# Altium PCB PCB1.PcbDoc
Units mm, origin at the board's own origin, x right, y up, seen from the top; angles counter-clockwise.
Board outline 51.69 x 44.07 mm, 2 copper layers (Top Layer, Bottom Layer); 36 components, 30 nets, 140 pads, 19 vias.
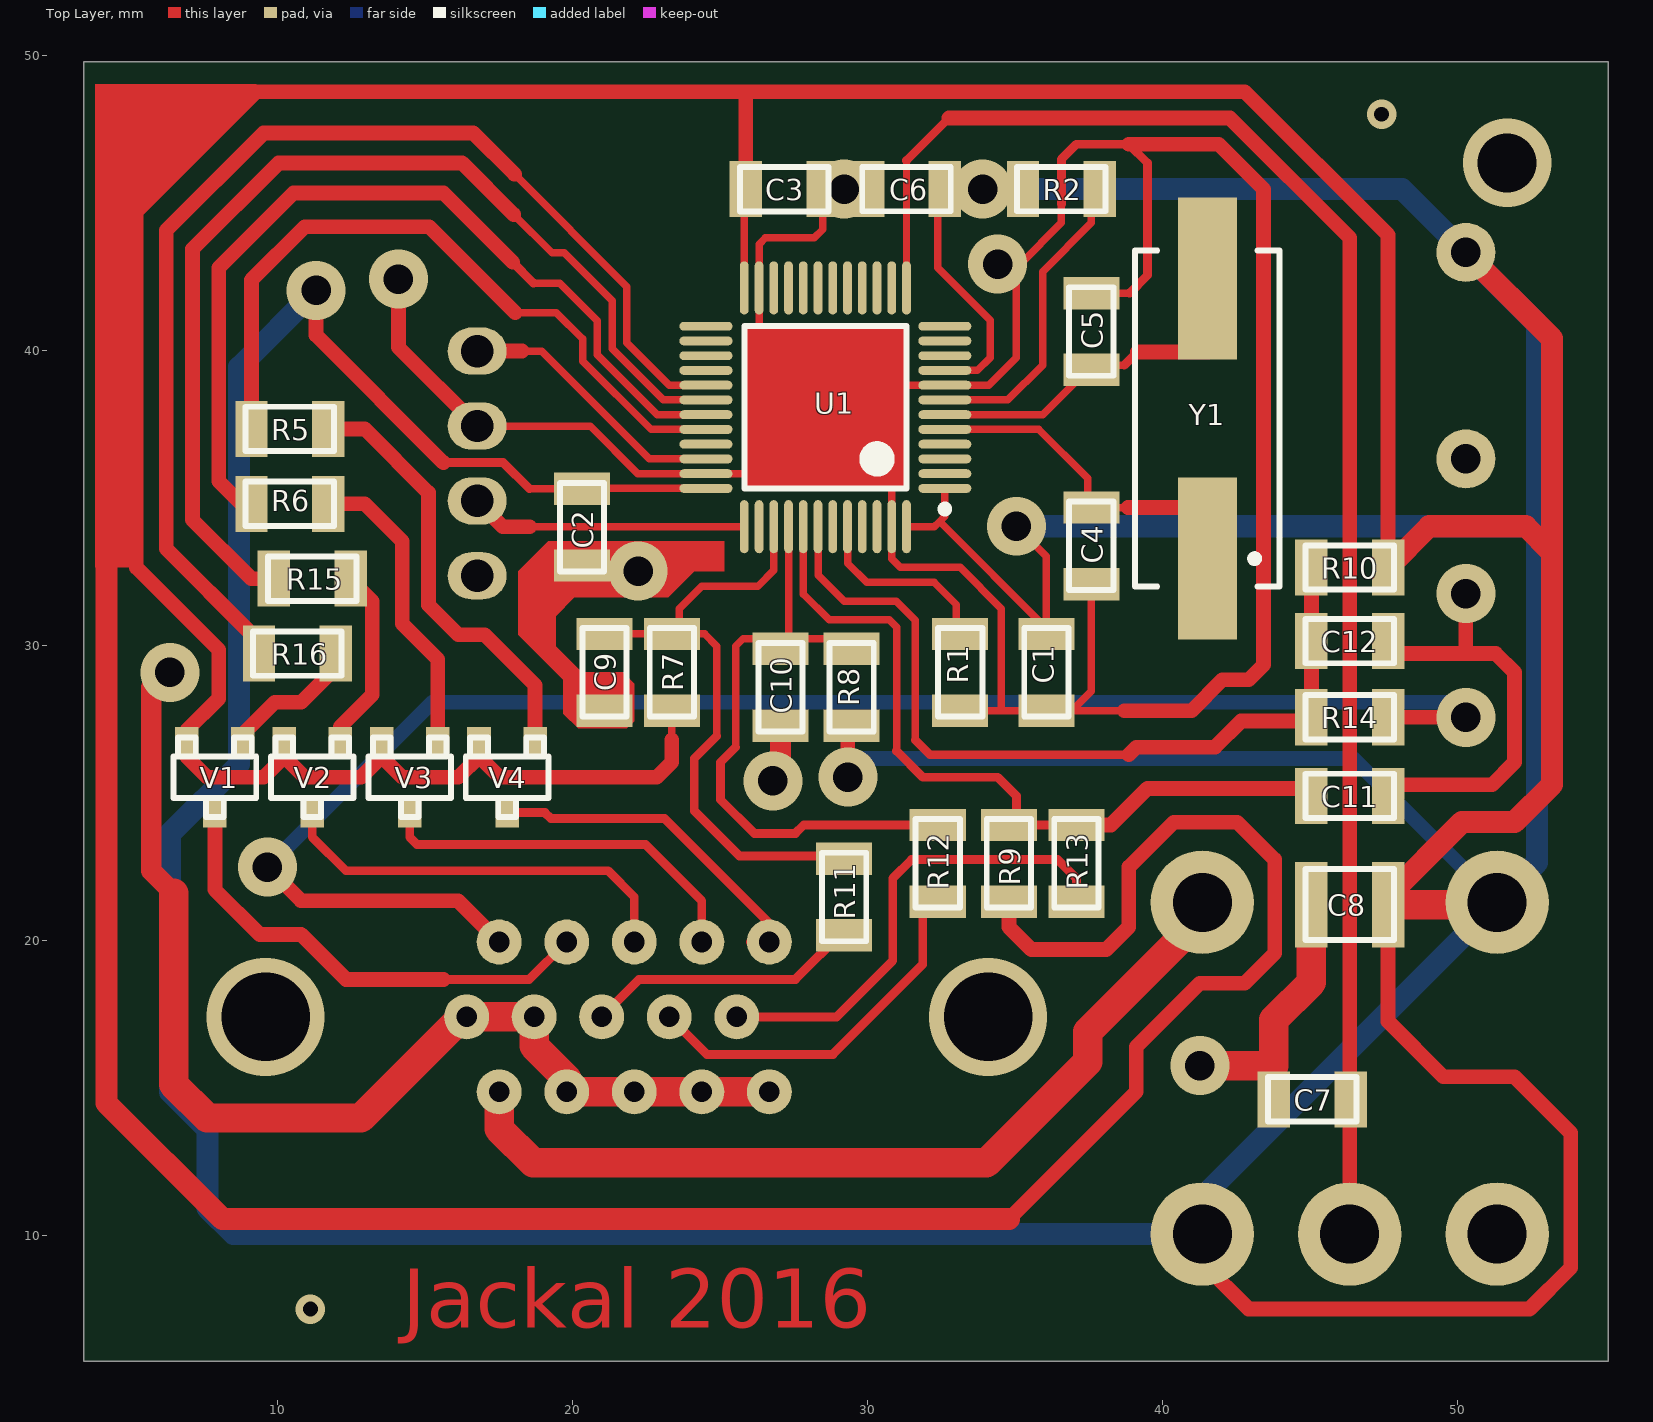
[diagram p0: Top Layer view]
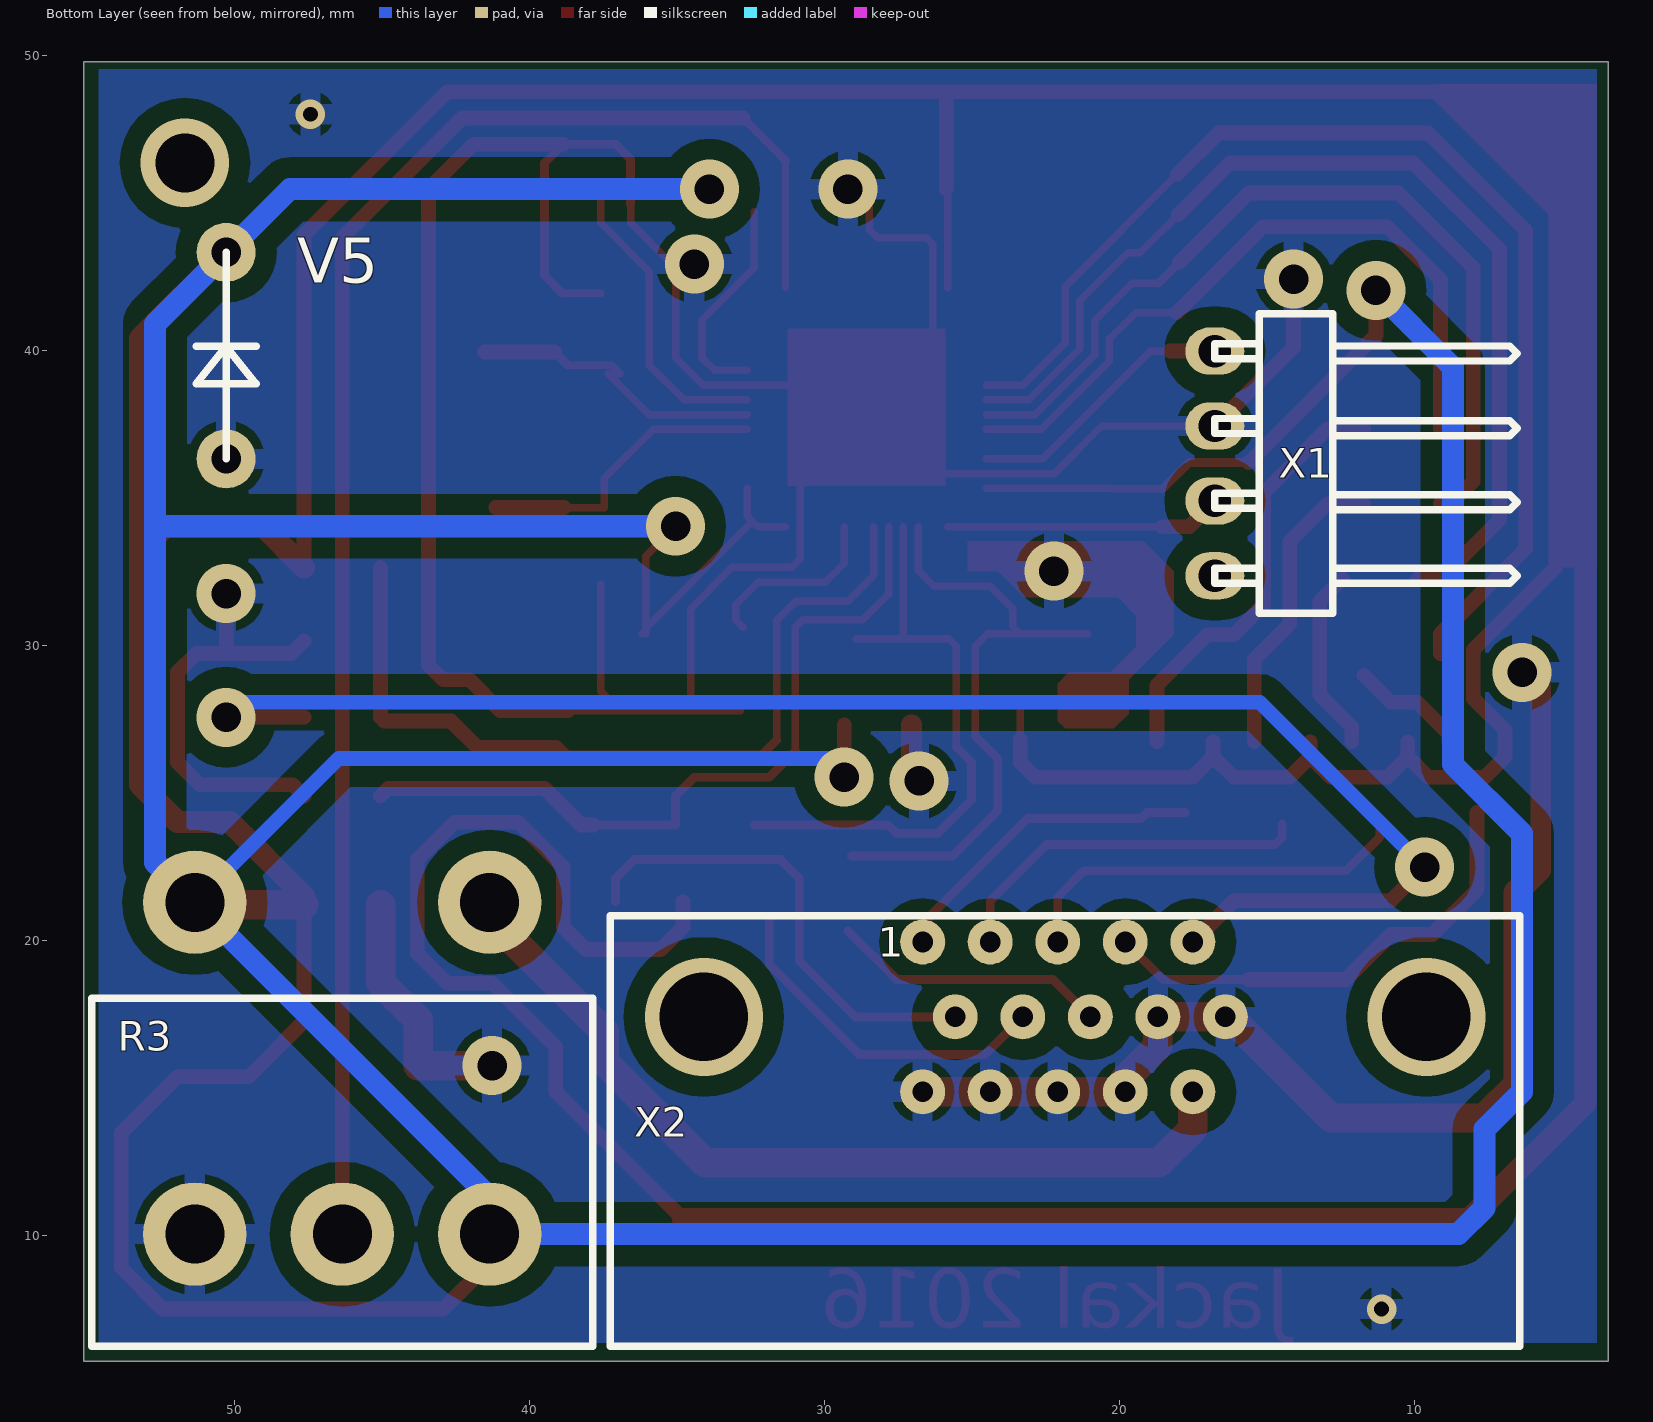
[diagram p1: Bottom Layer view, seen from below]

## Layer stack, top to bottom
Top Solder: solder mask 0.0102, Solder Resist, Dk 3.5
Top Layer: signal copper 0.0356
Dielectric 1: dielectric 0.32, FR-4, Dk 4.8
Bottom Layer: signal copper 0.0356
Bottom Solder: solder mask 0.0102, Solder Resist, Dk 3.5

## Board outline
3.429,5.715 55.118,5.715 55.118,49.784 3.429,49.784

## Design rules (kind name [scope] priority, off if disabled: settings)
Clearance Clearance_for_poly [All vs InPolygon] p1: gap=0.7
Clearance [All] p2: gap=0.2
PlaneClearance [All] p1: clearance=0.7
PolygonConnect [All] p1: connectstyle=Relief reliefconductorwidth=0.7 reliefentries=4 polygonreliefangle="90 Angle" airgapwidth=0.3
RoomDefinition RoomLQFP [InComponentClass('Sheet')] p1: confinementstyle=ConfineIn formatcopy=TRUE lockcomponents=FALSE outline 18.796,44.958 38.608,44.958 38.608,27.559 18.796,27.559
RoutingVias [All] p1: holewidth=0.711 width=1.27 viastyle="Through Hole" minholewidth=0.711 minwidth=1.27 maxholewidth=0.711 maxwidth=1.27
SolderMaskExpansion [All] p1: expansion=0.102
Width Width_for_LQFP_room [TouchesRoom('RoomLQFP') AND (NOT OnLayer('Bottom Layer'))] p1: maxlimit=0.254 minlimit=0.254 preferedwidth=0.254
Width [All] p2: maxlimit=1 minlimit=0.3 preferedwidth=1
28 further rules are at their usual default settings.

## Components (designator, comment, footprint, x,y, rotation, side; value= is the part's Value field where it differs from the comment)
C1 "C1206" C1206 36.068,29.083 r90 top
C2 "C1206" C1206 20.32,34.006 r90 top
C3 "C1206" C1206 27.178,45.466 r180 top
C4 "C1206" C1206 37.592,33.371 r90 top
C5 "C1206" C1206 37.592,40.64 r270 top
C6 "C1206" C1206 31.325,45.466 r0 top
C7 "C1206" C1206 45.085,14.605 r0 top
C8 "33mk" C1210 46.355,21.209 r0 top
C9 "C1206" C1206 21.082,29.083 r90 top
C10 "C1206" C1206 27.051,28.575 r90 top
C11 "C1206" C1206 46.355,24.892 r180 top
C12 "C1206" C1206 46.355,30.141 r180 top
R1 "R1206-0,25 W" R1206 33.147,29.083 r90 top
R2 "R1206-0,25 W" R1206 36.576,45.466 r0 top
R3 "10k" S16KN1 46.355,10.033 r180 bottom
R5 "R1206-0,25 W" R1206 10.414,37.338 r0 top
R6 "R1206-0,25 W" R1206 10.414,34.798 r0 top
R7 "R1206-0,25 W" R1206 23.368,29.083 r270 top
R8 "R1206-0,25 W" R1206 29.464,28.575 r270 top
R9 "R1206-0,25 W" R1206 34.798,22.606 r270 top
R10 "R1206-0,25 W" R1206 46.355,32.639 r0 top
R11 "R1206-0,25 W" R1206 29.21,21.463 r90 top
R12 "R1206-0,25 W" R1206 32.385,22.606 r90 top
R13 "R1206-0,25 W" R1206 37.084,22.606 r90 top
R14 "R1206-0,25 W" R1206 46.355,27.559 r180 top
R15 "R1206-0,25 W" R1206 11.176,32.258 r0 top
R16 "R1206-0,25 W" R1206 10.668,29.718 r0 top
U1 "STM32F103C8T6" LQFP48_N 28.575,38.07 r180 top
V1 "BSS84" SOT-23 7.874,25.527 r180 top
V2 "BSS84" SOT-23 11.176,25.527 r180 top
V3 "BSS84" SOT-23 14.478,25.527 r180 top
V4 "BSS84" SOT-23 17.78,25.527 r180 top
V5 "1N4001" doid 50.292,36.322 r90 bottom
X1 "PLS-4R" PLS-4R 16.764,32.355 r90 bottom
X2 "sourse" DHR15-FB 21.844,17.399 r180 bottom
Y1 "XTAL" HC49/4H_SMX 41.529,37.689 r90 top

## Footprints (in the part's own frame and the unit in brackets; to place one, negate y for a bottom-side part, rotate by r counter-clockwise, add the part's x,y. Pads: shape width x height; smd on the part's side, far side on the other; paste and mask are expansions set on the pad)
C1206 [mm]
  rect 1.1x1.9 smd: 1(-1.3,0) 2(1.3,0)
  silkscreen extent -1.5,-0.75 1.5,0.75, body extent -1.61,-0.86 1.61,0.86, height 1.5
C1210 [mm]
  rect 1.1x2.9 smd: 1(-1.3,0) 2(1.3,0)
  silkscreen extent -1.5,-1.2 1.5,1.2, body extent -1.61,-1.31 1.61,1.31, height 1.7
DHR15-FB [mil]
  round 60 hole 27.56: 1(-190.16,100) 2(-100,100) 3(-9.84,100) 4(80.32,100) 5(170.47,100) 6(-146.65,0) 7(-56.5,0) 8(33.66,0) 9(123.82,0) 10(213.98,0) 11(-190.16,-100) 12(-100,-100) 13(-9.84,-100) 14(80.32,-100) 15(170.47,-100)
  silkscreen extent -607,-440 607,135, body extent -607,-696 606,135, height 495
doid [mm]
  round 2 hole 1: 1(7,0) 2(0,0)
  silkscreen extent 0,-1.02 7,1.02
HC49/4H_SMX [mm] "Quartz Crystal, SM; Body 13.4 (inc. leads) x 4.9 mm (LxW max)"
  rect 5.5x2 smd: 1(-4.75,0) 2(4.75,0)
  silkscreen extent -5.7,-2.45 5.7,2.45
LQFP48_N [mm] "Thin QFP, 48-Leads, Body 7x7mm, Pitch 0.5mm, IPC Medium Density"
  oval 1.8x0.3 smd: 1(-4.05,2.75) 2(-4.05,2.25) 3(-4.05,1.75) 4(-4.05,1.25) 5(-4.05,0.75) 6(-4.05,0.25) 7(-4.05,-0.25) 8(-4.05,-0.75) 9(-4.05,-1.25) 10(-4.05,-1.75) 11(-4.05,-2.25) 12(-4.05,-2.75) 25(4.05,-2.75) 26(4.05,-2.25) 27(4.05,-1.75) 28(4.05,-1.25) 29(4.05,-0.75) 30(4.05,-0.25) 31(4.05,0.25) 32(4.05,0.75) 33(4.05,1.25) 34(4.05,1.75) 35(4.05,2.25) 36(4.05,2.75)
  oval 0.3x1.8 smd: 13(-2.75,-4.05) 14(-2.25,-4.05) 15(-1.75,-4.05) 16(-1.25,-4.05) 17(-0.75,-4.05) 18(-0.25,-4.05) 19(0.25,-4.05) 20(0.75,-4.05) 21(1.25,-4.05) 22(1.75,-4.05) 23(2.25,-4.05) 24(2.75,-4.05) 37(2.75,4.05) 38(2.25,4.05) 39(1.75,4.05) 40(1.25,4.05) 41(0.75,4.05) 42(0.25,4.05) 43(-0.25,4.05) 44(-0.75,4.05) 45(-1.25,4.05) 46(-1.75,4.05) 47(-2.25,4.05) 48(-2.75,4.05)
  silkscreen extent -4.18,-2.75 2.75,3.57, body extent -3.5,-3.5 3.5,3.5, height 1.6
PLS-4R [mm]
  oval 1.6x2 hole 1.1: 1(0,0) 2(2.54,0) 3(5.08,0) 4(7.62,0)
  silkscreen extent -1.27,-10.25 8.89,0
R1206 [mm]
  rect 1.1x1.9 smd: 1(-1.3,0) 2(1.3,0)
  silkscreen extent -1.5,-0.75 1.5,0.75, body extent -1.61,-0.86 1.61,0.86, height 0.6
S16KN1 [mm]
  round 3.5 hole 2: 1(-5,0) 2(0,0) 3(5,0) 4(-5,11.25) 5(5,11.25)
  silkscreen extent -8.5,-3.8 8.5,8, body extent -7.87,-20.73 7.87,4.83, height 20.62
SOT-23 [mm]
  rect 0.8x1 smd: 1(-0.95,-1.2) 2(0.95,-1.2) 3(0,1.2)
  silkscreen extent -1.4,-1.35 1.4,1.35, body extent -1.5,-1.45 1.5,1.45, height 1.1

## Part data
C1 C2 C3 C6 C7 C9 C10 C11 C12: library part "Condensator 1206 100"
C4 C5: library part "Condensator 1206 20"
C8: library part "Condensator 1210 33mk"
R1 R2 R5 R6 R7 R8 R9 R10 R11 R12 R13 R14 R15 R16: library part "Resistor 1206 10k"
R3: library part "Resistor S16KN1"
U1: "STM32 ARM-based 32-bit MCU with 64 Kbytes Flash, 48-pin LQFP, Industrial Temperature"
V5: library part 1N4007
X1: library part "Разъем PLS-4R"
X2: library part DHR-15FB
Y1: "Crystal Oscillator"

## Via types
v1: diameter 2, hole 1, Top Layer to Bottom Layer, 14 vias
v2: diameter 4, hole 3, Top Layer to Bottom Layer, 2 vias
v3: diameter 1, hole 0.5, Top Layer to Bottom Layer, 2 vias
v4: diameter 3, hole 2, Top Layer to Bottom Layer, 1 vias

## Nets (pads, with @x,y where several pads share a name; then routed paths per layer and width w, separated by ;. In a path a pad name is that pad's centre, name@x,y a point inside that pad or via, vN(x,y) a via of type N, cw(c..) or ccw(c..) an arc to the next point about the centre after c; other vN are vias at no path point)
ADC1_IN3: C7.2 R3.2 U1.13 | length 55.4
  Top Layer w0.254: U1.13 31.325,46.438
  Top Layer w0.3: 31.325,46.438 32.766,47.879
  Top Layer w0.5: 32.766,47.879 42.291,47.879 46.355,43.815 R3.2
GND: C1.1 C2.1 C3.1 C4.1 C5.1 C6.1 C7.1 C8.1 C9.1 C10.1 C11.1 C12.1 R1.1 R3.1 U1.8 U1.23 U1.35 U1.47 V5.2 X1.3 X2.9 X2.10 X2.11 X2.12 X2.13 X2.14 | length 156.7
  Top Layer w0.254: X1.3 20.604,37.435 22.219,35.82 U1.35 26.253,35.82 ; 26.325,40.265 U1.23 26.325,43.597 26.543,43.815 28.194,43.815 28.478,44.099 C3.1 ; 30.746,38.82 U1.8 34.121,38.82 35.052,39.751 35.052,42.291 v1(34.417,42.926) 35.179,42.926 36.576,44.323 36.576,44.958 ; 30.825,36.074 U1.47 30.825,32.929 31.115,32.639 33.147,32.639 34.544,31.242 34.544,27.783 ; R1.1@32.868,27.783 34.544,27.783 ; C4.1 37.592,28.448 C1.1@36.927,27.783 ; C5.1 38.892,41.94 ; 38.705,27.783 C1.1@36.927,27.783 ; 34.544,27.783 C1.1 C1.1@36.927,27.783
  Top Layer w0.3: 36.576,44.958 36.576,46.482 37.084,46.99 38.862,46.99 39.497,46.355 39.497,42.545 38.892,41.94
  Top Layer w0.5: v1(14.097,42.418) 14.097,40.102 X1.3 ; v1(26.797,25.4) v1@27.051,25.654 ; 38.705,27.783 40.991,27.783 42.037,28.829 42.926,28.829 43.434,29.337 43.434,45.466 41.91,46.99 38.862,46.99 ; C11.1 48.036,25.273 51.181,25.273 51.943,26.035 51.943,29.083 51.308,29.718 50.292,29.718 ; C12.1 48.078,29.718 50.292,29.718 ; v1(50.292,31.75) 50.292,29.718
  Top Layer w0.7: v1@5.715,28.575 5.715,22.352 6.477,21.59 ; v1@27.051,25.654 C10.1@27.051,27.305
  Top Layer w1: 6.477,21.59 6.477,15.113 7.62,13.97 12.827,13.97 16.256,17.399 X2.10 X2.9 18.699,16.413 19.804,15.308 X2.14 X2.13 X2.12 X2.11 ; v1(41.275,15.748) 43.785,15.748 43.785,17.302 45.055,18.572 C8.1
  other v1: 6.35,29.083 22.225,32.512 29.21,45.466
  other v3: 11.112,7.493 47.434,48.006
LED1: V1.3 X2.4 | length 16.3
  Top Layer w0.3: 15.621,18.669 18.534,18.669 X2.4
  Top Layer w0.5: V1.3 7.874,21.717 9.398,20.193 10.795,20.193 12.319,18.669 15.621,18.669
LED2: V2.3 X2.3 | length 13.7
  Top Layer w0.3: V2.3@11.176,23.946 11.176,23.495 12.319,22.352 21.205,22.352 22.094,21.463 X2.3
LED3: V3.3 X2.2 | length 12.6
  Top Layer w0.3: V3.3@14.478,23.946 14.478,23.495 14.732,23.241 22.479,23.241 24.384,21.336 X2.2
LED4: V4.3 X2.1 | length 11.7
  Top Layer w0.3: V4.3 19.064,24.327 19.261,24.13 23.114,24.13 26.674,20.57 X2.1 X2.1@26.035,19.939
NetC4_2: C4.2 U1.5 Y1.1 | length 10.2
  Top Layer w0.254: U1.5 35.802,37.32 37.465,35.657 37.465,34.671 38.832,34.671
  Top Layer w0.5: 38.832,34.671 Y1.1@41.148,34.671
NetC5_2: C5.2 U1.6 Y1.2 | length 10.6
  Top Layer w0.254: U1.6@32.625,37.797 U1.6 35.945,37.82 37.338,39.213 36.927,39.213 37.211,39.497 38.707,39.497
  Top Layer w0.3: 38.707,39.497 39.155,39.945
  Top Layer w0.5: 39.155,39.945 Y1.2@41.529,39.945
NetR1_2: R1.2 U1.44 | length 6.4
  Top Layer w0.254: U1.44 29.325,32.778 29.972,32.131 32.258,32.131 33.02,31.369 33.02,30.861 R1.2@32.766,30.607
NetR2_2: R2.2 U1.7 | length 10.7
  Top Layer w0.254: U1.7 34.764,38.32 35.941,39.497 35.941,42.672 37.592,44.323 R2.2@37.592,45.66
NetR3_5: R3.5 X2.15 | length 30.1
  Top Layer w1: X2.15 17.514,13.601 18.669,12.446 34.036,12.446 37.465,15.875 37.465,16.891 41.355,20.781 R3.5
NetR5_2: R5.2 V4.1 | length 14.8
  Top Layer w0.5: R5.2 12.954,37.338 15.113,35.179 15.113,31.369 16.129,30.353 17.018,30.353 18.73,28.641 V4.1
NetR6_2: R6.2 V3.1 | length 10.3
  Top Layer w0.5: R6.2 12.954,34.798 14.224,33.528 14.224,30.734 15.428,29.53 V3.1
NetR15_2: R15.2 V2.1 | length 6.3
  Top Layer w0.5: V2.1 12.126,27.239 13.208,28.321 13.208,31.496 R15.2@12.446,32.258
NetR16_2: R16.2 V1.1 | length 4
  Top Layer w0.5: V1.1 8.824,26.985 9.906,28.067 10.795,28.067 R16.2@11.714,28.986
PB3: C9.2 R7.1 R11.2 U1.39 | length 21.7
  Top Layer w0.254: C9.2 R7.1 ; 24.892,26.924 24.892,29.972 24.481,30.383 R7.1 ; U1.39 26.825,32.54 26.289,32.004 24.384,32.004 23.622,31.242 23.622,30.637 R7.1
  Top Layer w0.3: 24.892,26.924 24.13,26.162 24.13,24.384 25.654,22.86 R11.2@29.083,22.86
PB4: C10.2 R8.1 R12.2 U1.40 | length 20.7
  Top Layer w0.254: 25.527,26.543 25.527,29.972 25.781,30.226 27.148,30.226 R8.1@28.926,30.226 ; C10.2@27.325,30.226 U1.40
  Top Layer w0.3: 25.527,26.543 25.019,26.035 25.019,24.765 26.162,23.622 27.559,23.622 27.843,23.906 R12.2
PB5: C11.2 R9.1 R13.2 U1.41 | length 26.4
  Top Layer w0.254: U1.41 27.825,31.738 28.702,30.861 30.734,30.861 30.988,30.607 30.988,26.416
  Top Layer w0.3: 30.988,26.416 31.877,25.527 34.417,25.527 35.052,24.892 35.052,23.906 R13.2@37.846,23.906
  Top Layer w0.5: R13.2@37.846,23.906 38.257,23.906 39.497,25.146 44.801,25.146 C11.2
PB6: C12.2 R10.1 R14.2 U1.42 | length 28.9
  Top Layer w0.254: U1.42 28.325,32.381 29.21,31.496 30.979,31.496 31.623,30.852 31.623,26.789
  Top Layer w0.3: 31.623,26.789 32.123,26.289 38.862,26.289
  Top Layer w0.5: 38.862,26.289 39.116,26.543 41.783,26.543 42.672,27.432 44.928,27.432 R14.2 R10.1
SB1: R11.1 X2.8 | length 9.4
  Top Layer w0.3: X2.8 22.259,18.669 27.559,18.669 R11.1@29.21,20.32
SB2: R12.1 X2.7 | length 12
  Top Layer w0.3: X2.7 24.549,16.129 28.829,16.129 31.877,19.177 R12.1@31.877,20.798
SB3: R13.1 X2.6 | length 16.4
  Top Layer w0.3: X2.6 28.956,17.399 30.861,19.304 30.861,22.098 31.496,22.733 36.449,22.733 37.084,22.098 R13.1
SB4: R14.1 X2.5 | length 54.7
  Top Layer w0.5: v1(9.652,22.479) 10.795,21.336 16.117,21.336 X2.5 ; R14.1 v1(50.292,27.559)
  Bottom Layer w0.5: v1(9.652,22.479) 15.24,28.067 49.784,28.067 v1(50.292,27.559)
SWCLK: U1.37 X1.2 | length 9.4
  Top Layer w0.254: 18.542,34.02 U1.37
  Top Layer w0.5: X1.2 17.639,34.02 18.542,34.02
SWDIO: U1.34 X1.4 | length 9.3
  Top Layer w0.254: 18.288,39.975 18.953,39.975 22.608,36.32 U1.34
  Top Layer w0.5: X1.4 18.288,39.975
TIM1_CH1: R16.1 U1.29 | length 39.9
  Top Layer w0.254: 18.034,45.974 21.844,42.164 21.844,40.259 23.283,38.82 U1.29
  Top Layer w0.5: R16.1@9.114,29.718 9.114,30.383 6.223,33.274 6.223,44.069 9.525,47.371 16.637,47.371 18.034,45.974
TIM1_CH2: R15.1 U1.30 | length 35.7
  Top Layer w0.254: 18.005,44.606 19.304,43.307 19.723,43.307 21.344,41.686 21.344,40.052 23.076,38.32 U1.30
  Top Layer w0.5: R15.1 9.114,32.258 7.112,34.26 7.112,43.434 10.033,46.355 16.256,46.355 18.005,44.606
TIM1_CH3: R6.1 U1.31 | length 30
  Top Layer w0.254: 18.677,42.283 19.566,42.283 20.844,41.005 20.844,39.845 22.869,37.82 U1.31
  Top Layer w0.3: 17.97,42.989 18.677,42.283
  Top Layer w0.5: R6.1 8.763,34.798 8.001,35.56 8.001,42.799 10.541,45.339 15.621,45.339 17.97,42.989
TIM1_CH4: R5.1 U1.32 | length 24.5
  Top Layer w0.254: 18.06,41.275 19.455,41.275 20.344,40.386 20.344,39.638 22.662,37.32 U1.32
  Top Layer w0.5: R5.1 9.114,42.388 10.922,44.196 15.139,44.196 18.06,41.275
VCC_3.3: C1.2 C2.2 C3.2 C6.2 C8.2 R2.1 R3.3 R3.4 R7.2 R8.2 R9.2 R10.2 U1.1 U1.9 U1.24 U1.36 U1.48 V1.2 V2.2 V3.2 V4.2 V5.1 | length 466.3
  Top Layer w0.254: 18.542,35.306 C2.2 ; C2.2@20.334,35.32 U1.36 ; 23.368,26.797 R7.2 ; U1.24 C3.2@25.825,45.616 ; U1.48 32.272,34.02 32.448,34.197 ; C6.2@32.385,44.704 32.385,42.799 34.163,41.021 34.163,39.751 33.732,39.32 U1.9 ; U1.1 32.625,34.373 32.448,34.197 ; v1(35.052,34.036) 36.068,33.02 C1.2@36.068,30.577 ; C1.2 C1.2@36.068,30.577 ; 32.448,34.197 C1.2@36.068,30.577
  Top Layer w0.3: 15.621,36.195 17.653,36.195 18.542,35.306
  Top Layer w0.5: v1(11.303,42.037) 11.303,40.513 15.621,36.195 ; 23.368,26.797 23.368,26.035 22.86,25.527 17.526,25.527 16.83,26.223 V4.2 16.83,26.228 16.129,25.527 14.224,25.527 13.528,26.223 V3.2 13.528,26.228 12.827,25.527 10.922,25.527 10.226,26.223 V2.2 10.226,26.228 9.525,25.527 7.62,25.527 6.924,26.223 V1.2 6.924,27.117 8.001,28.194 8.001,29.845 5.207,32.639 5.207,44.704 9.271,48.768 42.799,48.768 47.655,43.912 R10.2 ; C3.2 25.878,48.768 ; v1@29.21,25.654 29.337,25.781 R8.2@29.337,27.305 ; 34.798,10.541 39.116,14.859 39.116,16.383 41.275,18.542 42.799,18.542 43.815,19.558 43.815,22.733 42.545,24.003 40.386,24.003 38.862,22.479 38.862,20.447 38.1,19.685 35.56,19.685 34.798,20.447 R9.2 ; R3.3@41.355,9.064 42.926,7.493 52.451,7.493 53.848,8.89 53.848,13.462 51.943,15.367 49.53,15.367 47.655,17.242 C8.2
  Top Layer w0.75: 4.191,38.481 4.191,14.478 8.128,10.541 34.798,10.541 ; C8.2 47.655,21.493 50.165,24.003 51.943,24.003 53.213,25.273 53.213,33.147 ; R10.2 49.052,34.036 52.324,34.036 53.213,33.147 ; V5.1 53.213,40.401 53.213,33.147
  Top Layer w1: R3.3@41.355,9.064 R3.3 ; C8.2 51.281,21.209 R3.4
  Bottom Layer w0.5: v1@29.21,25.654 29.21,26.035 29.337,26.162 46.476,26.162 R3.4
  Bottom Layer w0.75: v1(11.303,42.037) 8.696,39.43 8.696,25.968 6.35,23.622 6.35,14.859 7.62,13.589 7.62,10.922 8.509,10.033 R3.3 41.355,11.283 R3.4 52.705,22.633 52.705,33.909 ; v1(33.909,45.466) 48.133,45.466 52.705,40.894 52.705,33.909 ; v1(35.052,34.036) 52.578,34.036 52.705,33.909
  other v1: 29.337,25.527
pads on no net: U1.2 U1.3 U1.4 U1.10 U1.11 U1.12 U1.14 U1.15 U1.16 U1.17 U1.18 U1.19 U1.20 U1.21 U1.22 U1.25 U1.26 U1.27 U1.28 U1.33 U1.38 U1.43 U1.45 U1.46 X1.1
copper on no net:
  other v2: 9.594,17.399 34.094,17.399
  other v4: 51.689,46.355

## Polygon pours and split planes (outlines as drawn)
GND on Bottom Layer "Bottom Layer-No Net" (solid, pour order 4): 3.81,6.35 3.81,49.53 54.61,49.53 54.61,6.35

## Other copper
Top Layer:
  region net VCC_3.3: 3.81,49.022 9.271,49.022 9.271,48.514 5.334,44.577 5.334,33.147 5.207,33.02 5.207,32.639 3.81,32.639
  region net GND: 31.242,35.403 31.242,40.737 25.908,40.737 25.908,35.403
  region net GND: 20.32,29.083 19.431,29.972 19.431,30.988 20.066,31.623 23.241,31.623 24.13,32.512 25.146,32.512 25.146,33.528 19.177,33.528 18.161,32.512 18.161,30.353 19.685,28.829 19.685,27.686 20.193,27.178 21.844,27.178 22.098,27.432 22.098,28.702 21.717,29.083
  text "Jackal 2016" at 14.224,6.858 h2

## Dimensions
3.429,49.784 to 55.118,49.784 on Top Overlay
3.429,49.784 to 3.429,5.715 on Top Overlay

## Panel: embedded boards
"PCB1.PcbDoc" at 457.505,147.892, 1 rows x 1 columns, spacing 0 x 0, rotation 0
"PCB1.PcbDoc" at 457.505,194.31, 1 rows x 1 columns, spacing 0 x 0, rotation 0
"PCB1.PcbDoc" at 457.505,101.498, 1 rows x 1 columns, spacing 0 x 0, rotation 0
"PCB1.PcbDoc" at 350.647,101.473, 1 rows x 1 columns, spacing 0 x 0, rotation 0
"PCB1.PcbDoc" at 350.647,194.31, 1 rows x 1 columns, spacing 0 x 0, rotation 0
"PCB1.PcbDoc" at 350.647,147.892, 1 rows x 1 columns, spacing 0 x 0, rotation 0
"PCB1.PcbDoc" at 50.673,98.171, 1 rows x 1 columns, spacing 0 x 0, rotation 0
"PCB1.PcbDoc" at 457.708,147.892, 1 rows x 1 columns, spacing 0 x 0, rotation 0
"PCB1.PcbDoc" at 457.708,194.31, 1 rows x 1 columns, spacing 0 x 0, rotation 0
"PCB1.PcbDoc" at 457.708,101.498, 1 rows x 1 columns, spacing 0 x 0, rotation 0
"PCB1.PcbDoc" at 564.566,101.498, 1 rows x 1 columns, spacing 0 x 0, rotation 0
"PCB1.PcbDoc" at 564.566,194.31, 1 rows x 1 columns, spacing 0 x 0, rotation 0
"PCB1.PcbDoc" at 564.566,147.892, 1 rows x 1 columns, spacing 0 x 0, rotation 0

## Text inside footprints (layer, text, board x,y; h text height)
X2: Bottom Overlay "1" at 28.194,19.431 h1